# EAGLE board 0df31d63dfbe909de89ec65349751404 (EAGLE 7.1.0)
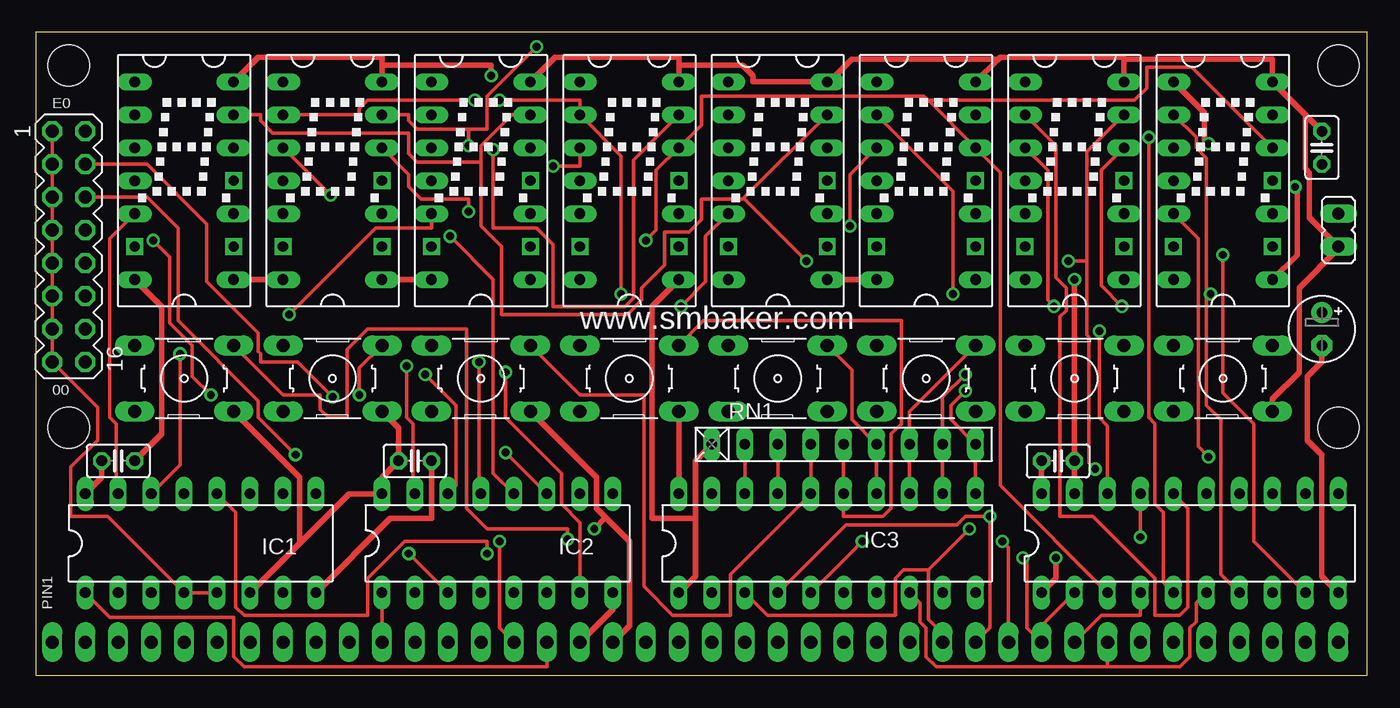
[diagram p0: board, top side]
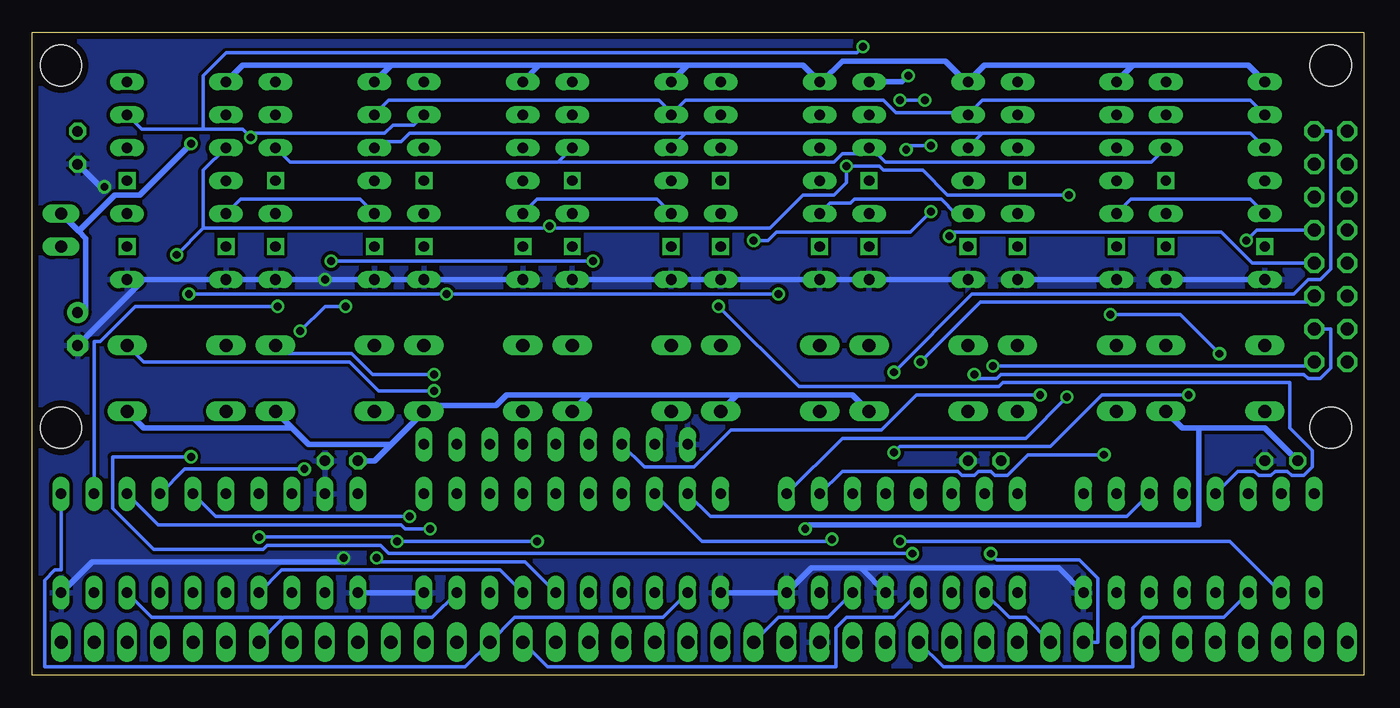
[diagram p1: board, bottom side, seen from below]

Size 102.54 x 49.52 mm. Coordinates in mm from the lower left corner, seen from the top.
Outline: 0,0 102.54,0 102.54,49.52 0,49.52 0,0
Copper layers (1*16): Top 0.035mm / dielectric 1.5mm / Bottom 0.035mm
Design rules "default *": minimum track width 10mil, minimum drill 24mil, track to track 10mil, track to pad 10mil, pad to pad 10mil, via to via 10mil, smd to smd 8mil, copper to edge 20mil, drill to drill 8mil, minimum pad ring 10mil, minimum via ring 8mil, stop-mask expansion 4mil, vias tented up to drill 25mil, thermal gap 10mil
Net classes: 1 PWR: width 0.406 mm
Holes 3.17 mm at 2.54,46.99 100.33,46.99 2.54,19.05 100.33,19.05

## Footprints (pad centres in the part's own frame; a part is rotated, then mirrored left to right if it is on the bottom)
C025-025X050 = drill 0.813 octagon: 1 -1.27,0; 2 1.27,0
E2,5-5 = drill 0.813 pad 1.6: + -1.27,0 | drill 0.813 pad 1.6 octagon: - 1.27,0
HTIL311A_EXTRAPADS = drill 0.813 long: 1 -3.81,7.62; 2 -3.81,5.08; 3 -3.81,2.54; 4 -3.81,0; 5 -3.81,-2.54; 7 -3.81,-7.62; 8 3.81,-7.62; 10 3.81,-2.54; 12 3.81,2.54; 13 3.81,5.08; 14 3.81,7.62 | drill 0.8 square: UNUSED1 3.81,0; UNUSED2 -3.81,-5.08; UNUSED3 3.81,-5.08
DIL16 = drill 0.813 long: 1 -8.89,-3.81; 2 -6.35,-3.81; 3 -3.81,-3.81; 4 -1.27,-3.81; 5 1.27,-3.81; 6 3.81,-3.81; 7 6.35,-3.81; 8 8.89,-3.81; 9 8.89,3.81; 10 6.35,3.81; 11 3.81,3.81; 12 1.27,3.81; 13 -1.27,3.81; 14 -3.81,3.81; 15 -6.35,3.81; 16 -8.89,3.81
DIL20 = drill 0.813 long: 1 -11.43,-3.81; 2 -8.89,-3.81; 3 -6.35,-3.81; 4 -3.81,-3.81; 5 -1.27,-3.81; 6 1.27,-3.81; 7 3.81,-3.81; 8 6.35,-3.81; 9 8.89,-3.81; 10 11.43,-3.81; 11 11.43,3.81; 12 8.89,3.81; 13 6.35,3.81; 14 3.81,3.81; 15 1.27,3.81; 16 -1.27,3.81; 17 -3.81,3.81; 18 -6.35,3.81; 19 -8.89,3.81; 20 -11.43,3.81
JP1 = drill 0.914 long: 1 0,-1.27; 2 0,1.27
RN-9 = drill 0.813 long: 1 -10.16,0; 2 -7.62,0; 3 -5.08,0; 4 -2.54,0; 5 0,0; 6 2.54,0; 7 5.08,0; 8 7.62,0; 9 10.16,0
MA08-2 = drill 1.016 octagon: 1 -8.89,-1.27; 2 -8.89,1.27; 3 -6.35,-1.27; 4 -6.35,1.27; 5 -3.81,-1.27; 6 -3.81,1.27; 7 -1.27,-1.27; 8 -1.27,1.27; 9 1.27,-1.27; 10 1.27,1.27; 11 3.81,-1.27; 12 3.81,1.27; 13 6.35,-1.27; 14 6.35,1.27; 15 8.89,-1.27; 16 8.89,1.27
SIP40 = drill 1.016 long: 1 -48.26,0; 2 -45.72,0; 3 -43.18,0; 4 -40.64,0; 5 -38.1,0; 6 -35.56,0; 7 -33.02,0; 8 -30.48,0; 9 -27.94,0; 10 -25.4,0; 11 -22.86,0; 12 -20.32,0; 13 -17.78,0; 14 -15.24,0; 15 -12.7,0; 16 -10.16,0; 17 -7.62,0; 18 -5.08,0; 19 -2.54,0; 20 0,0; 21 2.54,0; 22 5.08,0; 23 7.62,0; 24 10.16,0; 25 12.7,0; 26 15.24,0; 27 17.78,0; 28 20.32,0; 29 22.86,0; 30 25.4,0; 31 27.94,0; 32 30.48,0; 33 33.02,0; 34 35.56,0; 35 38.1,0; 36 40.64,0; 37 43.18,0; 38 45.72,0; 39 48.26,0; 40 50.8,0
BUTTON = drill 1.016 long: 1 -3.81,2.54; 2 3.81,2.54; 3 -3.81,-2.54; 4 3.81,-2.54

## Placement (x,y rotation side)
C1  [C025-025X050]  29.21,16.51 0 top
C3  [C025-025X050]  78.74,16.51 0 top
C5  [C025-025X050]  99.06,40.64 270 top
C7  [C025-025X050]  6.35,16.51 0 top
C8  [E2,5-5]  99.06,26.67 270 top
DIS1  HTIL311A_EXTRAPADS  [HTIL311A_EXTRAPADS]  11.43,38.1 0 top
DIS2  HTIL311A_EXTRAPADS  [HTIL311A_EXTRAPADS]  22.86,38.1 0 top
DIS3  HTIL311A_EXTRAPADS  [HTIL311A_EXTRAPADS]  34.29,38.1 0 top
DIS4  HTIL311A_EXTRAPADS  [HTIL311A_EXTRAPADS]  45.72,38.1 0 top
DIS5  HTIL311A_EXTRAPADS  [HTIL311A_EXTRAPADS]  57.15,38.1 0 top
DIS6  HTIL311A_EXTRAPADS  [HTIL311A_EXTRAPADS]  68.58,38.1 0 top
DIS7  HTIL311A_EXTRAPADS  [HTIL311A_EXTRAPADS]  80.01,38.1 0 top
DIS8  HTIL311A_EXTRAPADS  [HTIL311A_EXTRAPADS]  91.44,38.1 0 top
IC1  74HCT138N  [DIL16]  12.7,10.16 0 top
IC2  74HCT138N  [DIL16]  35.56,10.16 0 top
IC3  74HCT245N  [DIL20]  60.96,10.16 0 top
IC8  74HCT244N  [DIL20]  88.9,10.16 0 top
JP1  [JP1]  100.33,34.29 0 top
RN1  [RN-9]  62.23,17.78 0 top
SV1  [MA08-2]  2.54,33.02 270 top
U$1  RC2014  [SIP40]  49.53,2.54 0 top
U$2  BUTTON  [BUTTON]  11.43,22.86 0 top
U$3  BUTTON  [BUTTON]  22.86,22.86 0 top
U$4  BUTTON  [BUTTON]  34.29,22.86 0 top
U$5  BUTTON  [BUTTON]  45.72,22.86 0 top
U$6  BUTTON  [BUTTON]  57.15,22.86 0 top
U$7  BUTTON  [BUTTON]  68.58,22.86 0 top
U$8  BUTTON  [BUTTON]  80.01,22.86 0 top
U$9  BUTTON  [BUTTON]  91.44,22.86 0 top

## Library data of the parts
C1 C3 C5 C7 C8 = resistor
DIS1-DIS8 = scott; OC_FARNELL: unknown; OC_NEWARK: unknown
IC1-IC3 IC8 = 74xx-eu
JP1 = jumper
RN1 = resistor-net; OC_FARNELL: unknown; OC_NEWARK: unknown
SV1 = con-lstb; OC_FARNELL: unknown; OC_NEWARK: unknown
U$1-U$9 = scott

## Nets
+5V [PWR]: C1.1 C3.1 C5.1 C7.1 DIS1.14 DIS2.14 DIS3.14 DIS4.14 DIS5.14 DIS6.14 DIS7.14 DIS8.14 IC1.6 IC1.16 IC2.16 IC3.20 IC8.20 JP1.1 U$1.18 U$2.4 U$3.4 U$4.4 U$5.4 U$6.4 U$7.4 U$8.4 U$9.4
A0: IC1.1 U$1.16
A1: IC1.2 U$1.15
A2: IC1.3 U$1.14
A5: IC2.1 U$1.11
A6: IC2.2 U$1.10
A7: IC2.3 U$1.9
BD0: DIS2.3 DIS4.3 DIS6.3 DIS8.3 IC8.9
BD1: DIS2.2 DIS4.2 DIS6.2 DIS8.2 IC8.7
BD2: DIS2.13 DIS4.13 DIS6.13 DIS8.13 IC8.5
BD3: DIS2.12 DIS4.12 DIS6.12 DIS8.12 IC8.3
BD4: DIS1.3 DIS3.3 DIS5.3 DIS7.3 IC8.18
BD5: DIS1.2 DIS3.2 DIS5.2 DIS7.2 IC8.16
BD6: DIS1.13 DIS3.13 DIS5.13 DIS7.13 IC8.14
BD7: DIS1.12 DIS3.12 DIS5.12 DIS7.12 IC8.12
D0: IC3.2 IC8.11 U$1.27
D1: IC3.3 IC8.13 U$1.28
D2: IC3.4 IC8.15 U$1.29
D3: IC3.5 IC8.17 U$1.30
D4: IC3.6 IC8.2 U$1.31
D5: IC3.7 IC8.4 U$1.32
D6: IC3.8 IC8.6 U$1.33
D7: IC3.9 IC8.8 U$1.34
GND [PWR]: C1.2 C3.2 C5.2 C7.2 C8.- DIS1.7 DIS1.8 DIS2.7 DIS2.8 DIS3.7 DIS3.8 DIS4.7 DIS4.8 DIS5.7 DIS5.8 DIS6.7 DIS6.8 DIS7.7 DIS7.8 DIS8.7 DIS8.8 IC1.8 IC2.5 IC2.8 IC3.1 IC3.10 IC8.1 IC8.10 IC8.19 RN1.1 U$1.17
IORQ: IC2.4 U$1.26
IOSEL: IC1.4 IC1.5 SV1.1 SV1.3 SV1.5 SV1.7 SV1.9 SV1.11 SV1.13 SV1.15
LATCH3: DIS3.5 DIS4.5 IC1.14
M1: IC2.6 U$1.19
N$1: IC3.18 RN1.2 U$2.2
N$2 [PWR]: C8.+ DIS1.1 DIS2.1 DIS3.1 DIS4.1 DIS5.1 DIS6.1 DIS7.1 DIS8.1 JP1.2
N$3: DIS5.5 DIS6.5 IC1.13
N$4: DIS7.5 DIS8.5 IC1.12
N$5: IC2.15 SV1.16
N$6: IC2.14 SV1.14
N$7: IC2.13 SV1.12
N$8: IC2.12 SV1.10
N$9: IC2.11 SV1.8
N$10: IC2.10 SV1.6
N$11: IC2.9 SV1.4
N$12: IC2.7 SV1.2
N$13: DIS1.5 DIS2.5 IC1.15
N$14: IC3.17 RN1.3 U$3.2
N$15: IC3.16 RN1.4 U$4.2
N$18: IC3.15 RN1.5 U$5.2
N$19: IC3.14 RN1.6 U$6.2
N$20: IC3.13 RN1.7 U$7.2
N$21: IC3.12 RN1.8 U$8.2
N$22: IC3.11 RN1.9 U$9.2
N$32: IC1.11 IC3.19

## Tracks (layer width: path | path; a pad name or v marks a point on that pad's centre or on a via)
+5V  (via drill 0.61)
  Top 0.406: DIS1.14 17.14,47.62 26.67,47.62 26.67,46.99 | DIS2.14 26.67,46.99 | DIS3.14 40.01,47.62 49.53,47.62 49.53,46.99 | DIS4.14 49.53,46.99 | 49.53,46.99 54.45,46.99 55.24,46.2 55.24,45.72 DIS5.14 61.12,45.72 62.87,47.47 73.98,47.47 74.06,47.39 | 26.67,46.99 35.08,46.99 v35.08,46.2 | 74.06,47.39 74.3,47.62 83.82,47.62 83.82,47.47 | 74.06,47.39 DIS6.14 | DIS7.14 83.82,47.47 | 97.87,43.1 DIS8.14 95.25,47.47 83.82,47.47 | 97.87,43.1 C5.1 | 97.87,43.1 97.79,43.02 97.79,39.05 98.11,38.73 98.11,35.24 JP1.1 100.33,32.86 97.31,29.84 97.31,23.34 95.25,21.27 U$9.4 | IC1.16 5.08,15.24 C7.1 | 20.4,10.24 24.13,13.97 IC2.16 26.67,15.24 C1.1 27.94,19.05 U$3.4 | 20.4,10.24 IC1.6 | U$2.4 20.32,15.24 20.32,10.32 20.4,10.24 | C3.1 IC8.20 | U$5.4 IC3.20 | U$1.18 45.72,3.81 45.72,10.32 43.89,12.14 | 43.89,12.14 43.18,12.86 43.18,15.24 U$4.4 | 43.89,12.14 v43.02,11.27
  Bottom 0.406: v35.08,46.2 35.56,45.72 DIS3.14 | C7.1 7.62,19.05 12.7,19.05 | 12.7,19.05 13.97,19.05 U$2.4 | 75.01,17.7 76.2,16.51 C3.1 | 75.01,17.7 U$7.4 72.23,20.32 71.75,20.8 66.83,20.8 66.04,21.59 59.85,21.59 59.77,21.51 | 82.63,19.13 81.28,17.78 75.09,17.78 75.01,17.7 | 82.63,19.13 U$8.4 | U$9.4 93.98,19.05 82.71,19.05 82.63,19.13 | U$4.4 39.37,21.59 48.26,21.59 | U$5.4 48.26,21.59 | 59.77,21.51 59.69,21.59 48.26,21.59 | 59.77,21.51 U$6.4 | 12.7,19.05 12.7,11.59 42.7,11.59 v43.02,11.27
A0
  Top 0.254: IC1.1 5.71,4.45 15.24,4.45 15.24,1.43 16.03,0.64 39.37,0.64 U$1.16
A1  (via drill 0.61)
  Top 0.254: v35.72,10.32 35.72,3.65 U$1.15
  Bottom 0.254: IC1.2 10.32,10.32 v35.72,10.32
A2
  Bottom 0.254: IC1.3 10.79,4.45 16.99,4.45 17.78,3.65 17.78,0.64 32.38,0.64 U$1.14
A5
  Top 0.254: U$1.11 IC2.1
A6
  Bottom 0.254: IC2.2 27.3,4.45 26.04,4.45 U$1.10
A7  (via drill 0.61)
  Top 0.254: v28.73,9.37 IC2.3
  Bottom 0.254: v28.73,9.37 28.26,8.89 21.91,8.89 20.48,7.46 20.48,2.54 U$1.9
BD0  (via drill 0.61)
  Top 0.254: v22.7,36.99 DIS2.3 | v39.85,39.21 41.91,39.21 DIS4.3 | DIS6.3 62.71,38.58 v62.71,34.61 | IC8.9 93.82,10.32 93.82,19.37 91.44,21.75 v91.44,32.38
  Bottom 0.254: v22.7,36.99 32.07,36.99 33.97,38.89 36.99,38.89 37.31,39.21 v39.85,39.21 39.85,37.94 40.8,36.99 43.18,36.99 45.72,34.45 62.55,34.45 v62.71,34.61 62.71,34.45 89.38,34.45 | DIS8.3 89.38,38.89 89.38,34.45 | 89.38,34.45 v91.44,32.38
BD1  (via drill 0.61)
  Top 0.254: DIS2.2 24.92,43.18 24.92,43.66 25.56,44.29 v33.81,44.29 | v35.72,44.29 41.91,44.29 DIS4.2 45.09,40.01 v45.09,29.37 | IC8.7 91.28,7.78 91.28,19.68 90.17,20.8 90.17,29.37 | 90.17,29.37 90.17,39.85 89.38,40.64 89.38,41.43 DIS8.2 | DIS6.2 70.64,37.31 v70.64,29.37 | 90.17,29.37 v90.49,29.37
  Bottom 0.254: v35.72,44.29 v33.81,44.29 | v90.49,29.37 v70.64,29.37 v45.09,29.37
BD2  (via drill 0.61)
  Top 0.254: IC8.5 86.84,7.14 86.84,12.54 86.2,13.18 86.2,19.37 85.72,19.84 v85.72,41.43 | DIS2.13 28.73,43.18 28.73,42.7 29.37,42.07 33.34,42.07 | 33.34,42.07 34.77,42.07 34.77,44.61 v38.58,48.42 | DIS4.13 46.04,39.69 46.04,29.05 45.4,28.42 39.85,28.42 39.85,33.18 38.58,34.45 35.24,34.45 v35.24,40.48 | 33.34,42.07 v33.34,40.8
  Bottom 0.254: 89.38,42.07 94.14,42.07 DIS8.13 | 89.38,42.07 86.36,42.07 v85.72,41.43 85.88,41.75 75.41,41.75 74.77,42.39 73.18,42.39 DIS6.13 | v38.58,48.42 39.05,47.94 87.63,47.94 89.38,46.2 89.38,42.07 | v35.24,40.48 34.92,40.8 v33.34,40.8
BD3  (via drill 0.61)
  Top 0.254: DIS2.12 28.73,38.58 28.73,37.62 29.69,36.67 33.34,36.67 v33.34,35.72 | v46.99,33.5 47.78,34.29 47.78,38.89 DIS4.12 51.28,42.39 51.28,44.61 68.42,44.61 68.82,44.21 | 68.82,44.21 DIS6.12 74.3,38.73 74.3,14.61 IC8.3 | DIS8.12 89.06,46.83 85.57,46.83 85.57,45.24 84.61,44.29 68.9,44.29 68.82,44.21
  Bottom 0.254: v33.34,35.72 34.92,34.13 45.24,34.13 45.88,33.5 v46.99,33.5
BD4  (via drill 0.61)
  Top 0.254: IC8.18 82.55,19.21 81.92,19.84 v81.92,26.51 | v78.42,28.42 77.95,28.89 77.95,38.89 DIS7.3
  Bottom 0.254: DIS1.3 8.73,41.75 29.37,41.75 29.45,41.67 | DIS3.3 29.45,41.67 | 52.31,41.67 52.23,41.75 29.53,41.75 29.45,41.67 | 52.31,41.67 DIS5.3 | DIS7.3 75.72,41.12 74.14,41.12 73.5,41.75 52.39,41.75 52.31,41.67 | v81.92,26.51 80.01,28.42 v78.42,28.42
BD5
  Top 0.254: IC8.16 88.74,12.86 88.74,5.24 88.11,4.6 86.2,4.6 86.2,7.46 81.44,12.22 78.9,12.22 78.9,27.62 79.38,28.1 79.38,29.84 78.58,30.64 78.58,40.8 DIS7.2
  Bottom 0.254: DIS1.2 8.73,44.29 29.37,44.29 DIS3.2 30.48,43.34 36.04,43.34 36.99,44.29 52.23,44.29 DIS5.2 53.34,43.34 54.29,44.29 75.09,44.29 DIS7.2
BD6  (via drill 0.61)
  Top 0.254: v81.6,15.88 81.12,16.35 81.12,26.04 80.96,26.19 80.96,31.91 | 80.96,31.91 80.96,40.32 DIS7.13 | DIS1.13 17.3,43.18 17.3,42.7 18.26,41.75 28.73,41.75 28.73,40.16 29.37,39.53 34.29,39.53 | 34.29,39.53 34.29,40.8 36.67,43.18 DIS3.13 | 54.53,36.75 54.45,36.67 51.28,36.67 51.28,35.08 50.32,34.13 48.42,34.13 48.42,31.59 46.67,29.84 46.67,28.89 45.56,27.78 35.88,27.78 35.88,33.02 34.29,34.61 34.29,39.53 | 54.53,36.75 DIS5.13 | v79.53,31.91 80.96,31.91 | 54.53,36.75 v59.37,31.91
  Bottom 0.254: IC8.14 90.81,15.88 v81.6,15.88 | v59.37,31.91 v79.53,31.91
BD7  (via drill 0.61)
  Top 0.254: v83.66,28.42 82.07,30 82.07,38.89 DIS7.12
  Bottom 0.254: DIS1.12 16.35,39.53 36.83,39.53 37.94,40.64 DIS3.12 38.58,40.16 40.16,40.16 40.8,39.53 61.91,39.53 61.99,39.61 | 61.99,39.61 62.07,39.53 82.71,39.53 DIS7.12 | 61.99,39.61 DIS5.12 | IC8.12 97.79,25.72 97.31,25.72 94.61,28.42 v83.66,28.42
D0
  Bottom 0.254: IC3.2 53.98,4.45 65.41,4.45 U$1.27 69.22,0.64 101.6,0.64 101.6,7.3 100.81,8.1 100.33,8.1 IC8.11
D1  (via drill 0.61)
  Top 0.254: IC3.3 56.36,4.6 66.2,4.6 66.2,7.46 66.83,8.1 68.74,8.1 | 68.74,8.1 68.74,4.29 69.85,3.17 U$1.28 | 68.74,8.1 v71.91,11.27
  Bottom 0.254: IC8.13 92.87,11.59 74.14,11.59 73.82,11.27 v71.91,11.27
D2  (via drill 0.61)
  Top 0.254: IC3.4 62.39,11.59 70.96,11.59 71.6,12.22 v73.5,12.22 73.5,3.65 U$1.29
  Bottom 0.254: IC8.15 88.42,12.22 v73.5,12.22
D3  (via drill 0.61)
  Top 0.254: v63.66,10.32 IC3.5 | v74.45,10.32 74.93,9.84 U$1.30 | v85.09,10.64 IC8.17
  Bottom 0.254: v63.66,10.32 v74.45,10.32 74.77,10.64 v85.09,10.64
D4  (via drill 0.61)
  Top 0.254: v76.04,9.05 76.36,8.73 76.36,3.65 U$1.31 76.99,3.17 76.99,3.33 IC8.2
  Bottom 0.254: IC3.6 64.61,8.73 75.72,8.73 v76.04,9.05
D5
  Top 0.254: U$1.32 82.07,4.6 85.09,4.6 IC8.4
  Bottom 0.254: IC3.7 66.52,8.1 83.34,8.1 IC8.4
D6
  Top 0.254: IC3.8 68.1,5.56 68.1,4.13 68.58,3.65 68.58,1.43 69.37,0.64 82.55,0.64 | U$1.33 82.55,0.64 | IC8.6 89.38,5.56 89.38,4.13 88.9,3.65 88.9,1.43 88.11,0.64 82.55,0.64
D7
  Bottom 0.254: IC3.9 71.75,4.45 83.19,4.45 83.26,4.37 | U$1.34 83.26,4.37 | IC8.8 93.34,4.45 83.34,4.45 83.26,4.37
GND  (via drill 0.61)
  Top 0.406: IC8.10 99.06,7.62 99.06,16.99 97.95,18.1 97.95,23.02 99.06,24.13 C8.- | IC8.1 78.58,7.46 v78.58,9.05 | IC8.19 C3.2 v80.01,30.48 | v97,37.62 97.16,37.47 97.16,32.38 DIS8.8 | IC1.8 27.3,12.06 30.48,12.06 C1.2 | RN1.1 50.8,16.51 50.8,12.06 | 50.8,12.06 50.8,7.62 IC3.1 | U$1.17 44.45,5.08 IC2.8 | DIS2.7 DIS1.8 | C7.2 9.68,18.57 9.68,28.42 DIS1.7 | DIS6.7 DIS5.8 | DIS3.7 DIS2.8 | 50.8,12.06 47.47,12.06 47.47,28.42 DIS4.8
  Bottom 0.406: IC8.1 IC3.10 | v78.58,9.05 78.9,8.73 97.95,8.73 IC8.10 | C5.2 97.31,37.62 v97,37.62 | C8.- 94.14,30.32 DIS8.8 DIS8.7 DIS7.8 v80.01,30.48 DIS7.7 DIS6.8 DIS6.7 | 38.66,8.18 38.73,8.26 42.55,8.26 IC2.8 IC3.1 | 38.66,8.18 IC2.5 | IC1.8 23.5,8.26 38.58,8.26 38.66,8.18 | DIS1.7 DIS1.8 | DIS3.7 DIS3.8 DIS4.7 DIS4.8 DIS5.7 DIS5.8 | DIS2.8 DIS2.7
  pour Bottom: 0,0 0,49.53 102.87,49.53 102.87,0
IORQ
  Bottom 0.254: IC2.4 36.2,4.45 39.85,4.45 40.64,3.65 40.64,0.64 62.87,0.64 U$1.26
IOSEL
  Top 0.254: SV1.1 SV1.3 SV1.5 SV1.7 SV1.9 SV1.11 SV1.13 SV1.15 4.76,20.64 4.76,18.1 2.7,16.03 2.7,12.22 5.56,12.22 IC1.4 IC1.5
LATCH3  (via drill 0.61)
  Top 0.254: IC1.14 11.11,16.19 v11.11,24.77 | v19.53,27.78 26.19,34.45 30.48,34.45 DIS3.5
  Bottom 0.254: v11.11,24.77 14.13,27.78 v19.53,27.78 | DIS4.5 41.12,36.35 39.53,36.35 39.21,36.67 32.54,36.67 31.43,35.56 DIS3.5
M1
  Bottom 0.254: IC2.6 41.27,4.45 45.09,4.45 U$1.19
N$1  (via drill 0.61)
  Top 0.254: RN1.2 IC3.18 | U$2.2 19.05,21.59 21.91,21.59 21.91,20.48 22.54,19.84 23.97,19.84 23.97,25.08 25.56,26.67 33.18,26.67 33.18,12.86 34.77,11.27 40.96,11.27 v40.96,10.48
  Bottom 0.254: v40.96,10.48 41.12,10.32 50.96,10.32 IC3.18
N$2  (via drill 0.61)
  Top 0.406: v90.33,40.96 90.01,41.27 90.01,43.34 DIS8.1
  Bottom 0.406: DIS1.1 8.89,46.99 17.78,46.99 | DIS2.1 17.78,46.99 | 17.78,46.99 29.21,46.99 DIS3.1 30.64,45.72 32.23,47.31 40.16,47.31 41.75,45.72 DIS4.1 43.18,46.99 52.07,46.99 | 98.98,34.21 98.42,33.66 98.42,27.94 C8.+ | 98.98,34.21 JP1.2 | DIS5.1 52.07,46.99 | 63.58,46.91 63.5,46.99 52.07,46.99 | 63.58,46.91 DIS6.1 | 75.01,46.91 74.93,46.99 63.66,46.99 63.58,46.91 | 75.01,46.91 DIS7.1 | DIS8.1 86.36,46.99 75.09,46.99 75.01,46.91 | 98.98,34.21 96.2,36.99 94.3,36.99 v90.33,40.96
N$3  (via drill 0.61)
  Top 0.254: v49.69,28.42 51.59,30.32 51.59,33.81 DIS5.5
  Bottom 0.254: IC1.13 9.68,15.72 8.41,15.72 8.1,15.4 7.14,15.4 6.83,15.72 5.87,15.72 5.56,15.4 4.6,15.4 3.97,16.03 3.97,17.3 5.71,19.05 5.71,22.54 27.78,22.54 28.1,22.23 43.5,22.23 v49.69,28.42 | DIS6.5 63.66,36.67 54.45,36.67 DIS5.5
N$4  (via drill 0.61)
  Top 0.254: IC1.12 15.4,12.54 15.4,5.24 16.03,4.6 25.56,4.6 25.56,7.46 28.42,10.32 34.77,10.32 v34.77,9.37 | v90.33,16.83 89.53,17.62 89.53,33.66 DIS8.5
  Bottom 0.254: v34.77,9.37 75.09,9.37 75.72,10 84.45,10 84.77,9.68 93.19,9.68 96.36,12.86 96.36,16.83 v90.33,16.83 | DIS7.5 77.31,36.67 86.52,36.67 DIS8.5
N$5  (via drill 0.61)
  Top 0.254: IC2.15 29.05,14.13 29.05,19.37 28.57,19.84 v28.57,23.81
  Bottom 0.254: v28.57,23.81 4.13,23.81 SV1.16
N$6  (via drill 0.61)
  Top 0.254: IC2.14 32.38,14.61 32.38,20.8 v30,23.18
  Bottom 0.254: v30,23.18 29.69,22.86 28.26,22.86 27.94,23.18 4.6,23.18 4.29,22.86 3.33,22.86 2.54,23.65 2.54,26.67 SV1.14
N$7  (via drill 0.61)
  Top 0.254: IC2.13 34.13,14.13 v34.13,24.13
  Bottom 0.254: v34.13,24.13 29.53,28.73 4.29,28.73 SV1.12
N$8  (via drill 0.61)
  Top 0.254: IC2.12 35.24,15.56 35.24,30.48 v31.91,33.81
  Bottom 0.254: v31.91,33.81 31.59,34.13 10.95,34.13 8.57,31.75 SV1.10
N$9  (via drill 0.61)
  Top 0.254: v36.2,17.14 IC2.11 | v13.49,21.59 12.06,23.02 12.06,25.4 10.32,27.15 10.32,32.23 v9.05,33.5
  Bottom 0.254: v36.2,17.14 35.72,17.62 24.13,17.62 20.16,21.59 v13.49,21.59 | v9.05,33.5 8.26,34.29 SV1.8
N$10  (via drill 0.61)
  Top 0.254: v20,16.99 17.14,19.84 17.14,21.11 10.95,27.3 10.95,34.45 8.57,36.83 SV1.6
  Bottom 0.254: IC2.10 40.16,15.72 31.27,15.72 30.96,15.4 30,15.4 29.69,15.72 28.73,15.72 28.42,15.4 27.46,15.4 25.88,16.99 v20,16.99
N$11  (via drill 0.61)
  Top 0.254: v22.86,21.43 20.16,24.13 17.3,24.13 17.3,24.77 17.14,24.92 17.14,26.35 13.18,30.32 13.18,34.77 8.57,39.37 SV1.4
  Bottom 0.254: IC2.9 40.16,18.26 26.04,18.26 v22.86,21.43
N$12  (via drill 0.61)
  Top 0.254: IC2.7 41.91,11.75 40.48,13.18 40.48,15.56 36.2,19.84 v36.2,23.34
  Bottom 0.254: v36.2,23.34 30.16,29.37 5.4,29.37 4.29,30.48 3.33,30.48 2.54,31.27 2.54,41.91 SV1.2
N$13
  Top 0.254: IC1.15 6.19,14.13 6.19,19.37 5.71,19.84 5.71,33.66 DIS1.5
  Bottom 0.254: DIS2.5 17.94,36.67 8.73,36.67 DIS1.5
N$14  (via drill 0.61)
  Top 0.254: RN1.3 IC3.17 | U$3.2 24.92,23.65 v24.92,21.59
  Bottom 0.254: v24.92,21.59 34.45,21.59 37.15,18.89 48.74,18.89 51.59,16.03 55.4,16.03 RN1.3
N$15
  Top 0.254: RN1.4 IC3.16 53.5,7.78 53.5,4.6 49.05,4.6 46.83,6.83 46.83,21.59 41.91,21.59 U$4.2
N$18
  Top 0.254: RN1.5 IC3.15 62.23,12.22 65.25,12.22 65.88,12.86 65.88,18.57 66.67,19.37 66.67,27.3 51.44,27.3 U$5.2
N$19
  Top 0.254: IC3.14 RN1.6 62.87,19.68 62.87,23.5 U$6.2
N$20
  Top 0.254: IC3.13 RN1.7 67.31,20.32 U$7.2
N$21  (via drill 0.61)
  Top 0.254: IC3.12 RN1.8 69.85,21.43 v71.6,23.18
  Bottom 0.254: U$8.2 83.19,24.77 77.95,24.77 76.36,23.18 v71.6,23.18
N$22  (via drill 0.61)
  Top 0.254: IC3.11 RN1.9 70.48,19.68 70.48,20.8 v71.6,21.91
  Bottom 0.254: U$9.2 93.98,24.13 78.11,24.13 75.88,21.91 v71.6,21.91
N$32
  Bottom 0.254: IC1.11 18.26,12.22 50.32,12.22 IC3.19

## Text on the board
tPlace: E0 | www.smbaker.com | 00 | PIN1